# Altium PCB nrf52832_ciaa_dcdc.PcbDoc
Units mil, origin at the board's own origin, x right, y up, seen from the top; angles counter-clockwise.
Board outline 450.25 x 376.41 mil, 4 copper layers (Top Layer, Mid-Layer 1, Mid-Layer 2, Bottom Layer), stack 62.97 mil thick; 17 components, 46 nets, 84 pads, 42 vias.
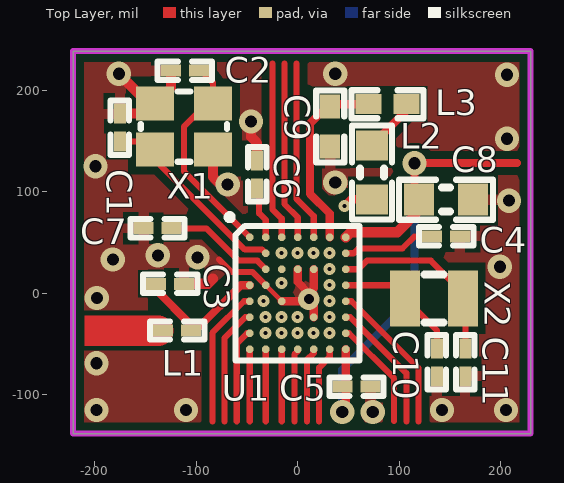
[diagram p0: Top Layer view]
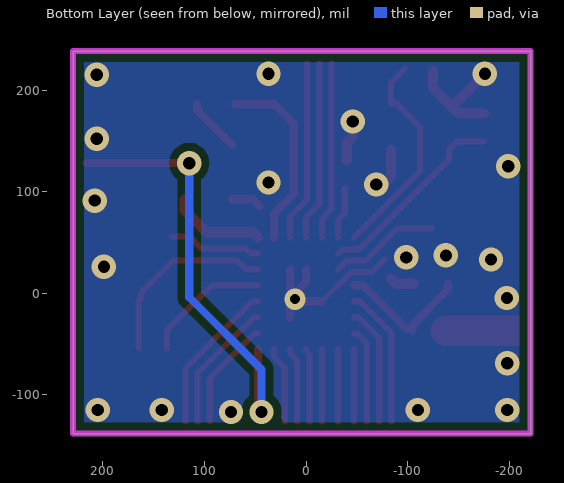
[diagram p1: Bottom Layer view, seen from below]
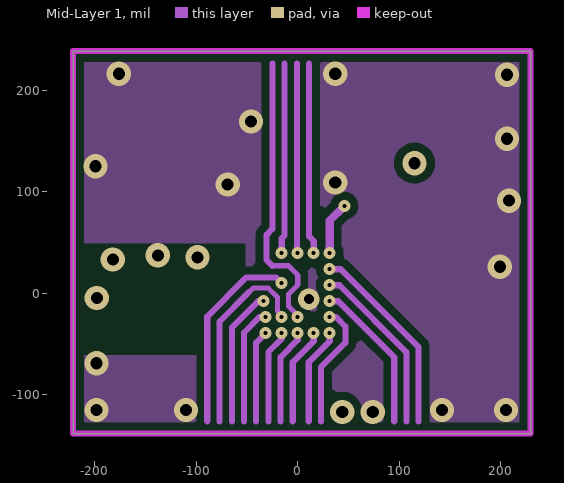
[diagram p2: Mid-Layer 1]
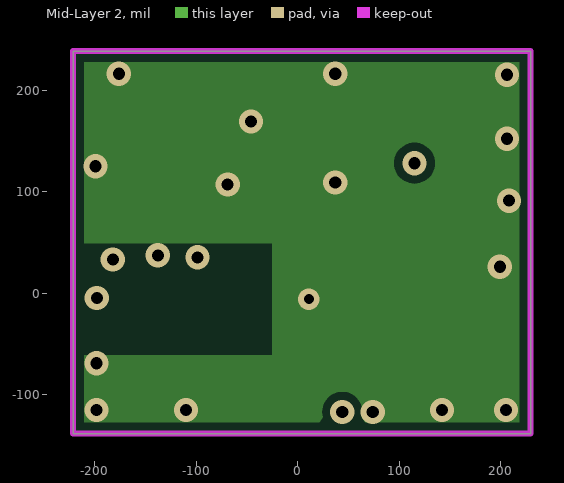
[diagram p3: Mid-Layer 2]
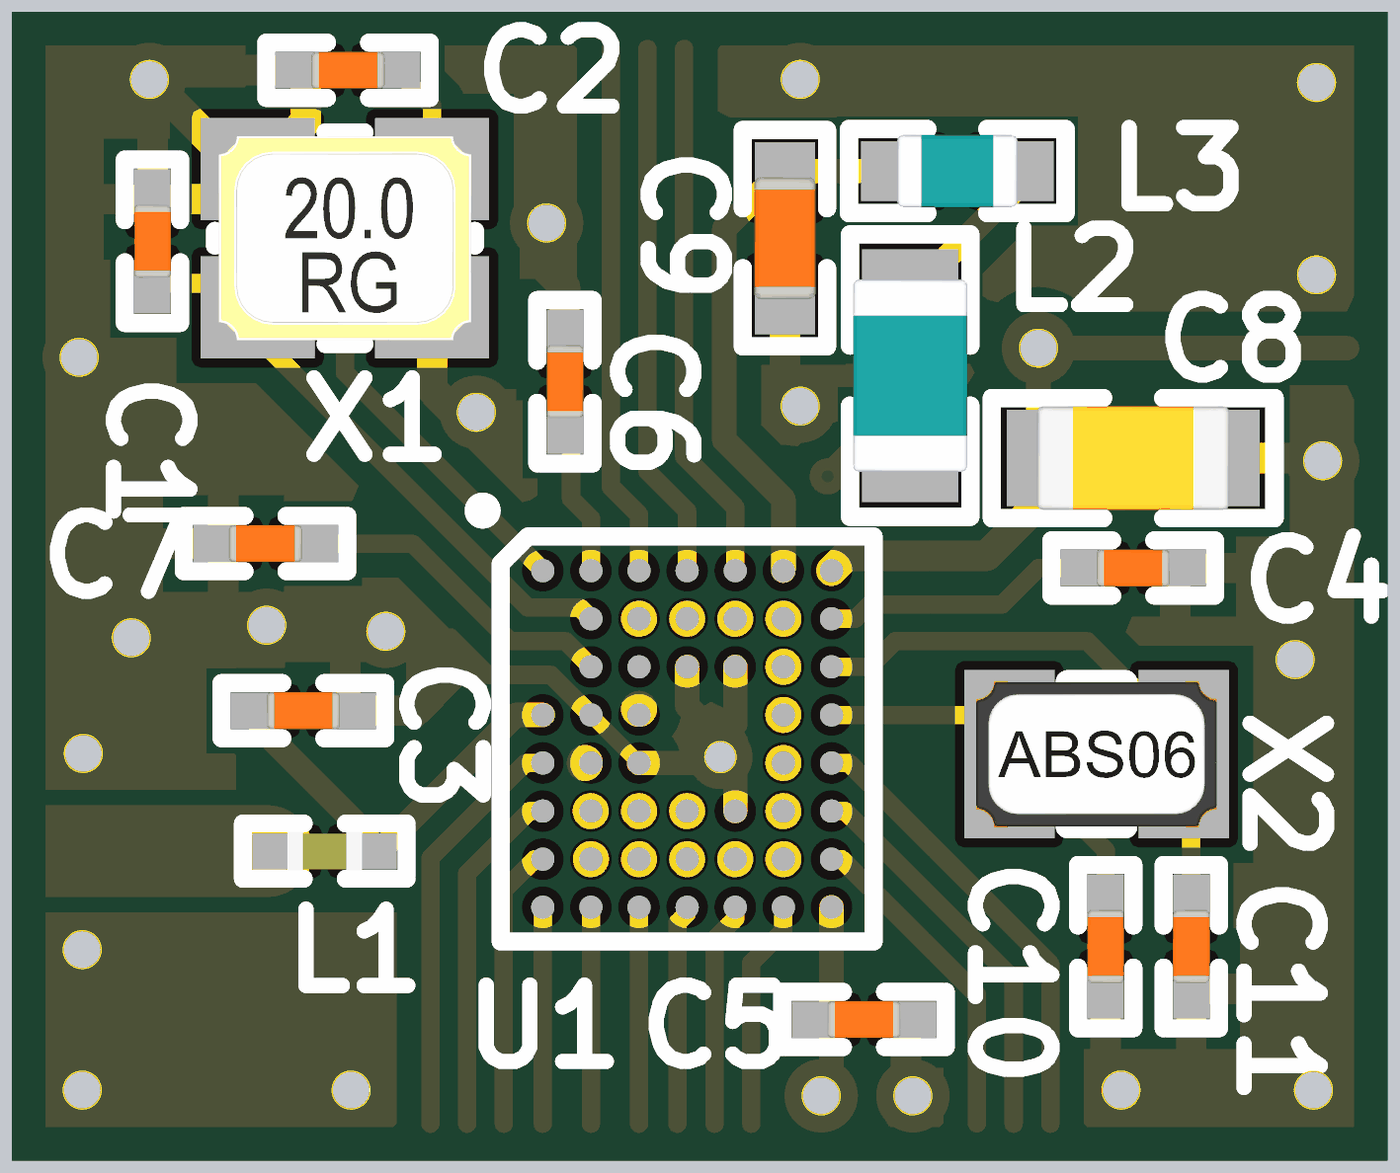
[diagram p4: 3D render of the assembled board from above, using the file's embedded part models]

## Layer stack, top to bottom
Top Solder: solder mask 0.4, Solder Resist, Dk 3.5
Top Layer: signal copper 1.4
Dielectric1: core 9, FR-4, Dk 4.8
Mid-Layer 1: signal copper 1.4
Dielectric2: prepreg 39.3701, FR-4, Dk 4.8
Mid-Layer 2: signal copper 1.4
Dielectric3: core 9, FR-4, Dk 4.8
Bottom Layer: signal copper 1.4
Bottom Solder: solder mask 0.4, Solder Resist, Dk 3.5

## Board outline
-221,-138.19 229.25,-138.19 229.25,238.22 -221,238.22

## Design rules (kind name [scope] priority, off if disabled: settings)
Clearance Polygon_ANT [(InNamedPolygon('Top_Layer-GND')) or (InNamedPolygon('Bottom_Layer-GND')) vs InNet('RF')] p1: gap=5 ignorepadtopadclearanceinfootprint=FALSE except(0: Arc-Hole Track-Hole SMDPad-Hole THPad-Hole Via-Hole Fill-Hole Poly-Hole Region-Hole Text-Hole)
Clearance Polygon [(InNamedPolygon('Top_Layer-GND')) or (InNamedPolygon('Bottom_Layer-GND')) or (InNamedPolygon('Mid_Layer_1-GND')) or (InNamedPolygon('Mid_Layer_2-GND'))] p2: gap=8 ignorepadtopadclearanceinfootprint=FALSE except(0: Arc-Hole Track-Hole SMDPad-Hole THPad-Hole Via-Hole Fill-Hole Poly-Hole Region-Hole Text-Hole)
Clearance [All] p3: gap=3.94 ignorepadtopadclearanceinfootprint=FALSE except(0: Arc-Hole Track-Hole SMDPad-Hole THPad-Hole Via-Hole Fill-Hole Poly-Hole Region-Hole Text-Hole)
ComponentClearance [All] p1 off: gap=10 collisioncheckmode=3 verticalgap=10 showdistances=FALSE
FabricationTestPointUsage TestPointUsage [All] p1: valid=0 allowmultiple=FALSE
FabricationTestpoint Testpoint [All] p1: side=3 testpointundercomponent=TRUE minsize=40 maxsize=100 preferedsize=60 minholesize=0 maxholesize=40 preferedholesize=32 testpointgrid=1 allowsidetop=TRUE allowsidebottom=TRUE usegrid=TRUE gridtolerance=0.01
Height [All] p1 off: minheight=0 maxheight=1000 prefheight=500
HoleSize [All] p1: absolutevalues=TRUE maxlimit=160 minlimit=3 maxpercent=80.000 minpercent=20.000
HoleToHoleClearance [All] p1 off: gap=3 allowstackedmicrovias=FALSE
MinimumAnnularRing [All] p1 off: minimumring=3.94
PolygonConnect PolygonConnect_1 [isVia and innet(gnd)] p1: connectstyle=Direct reliefconductorwidth=10 reliefentries=4 polygonreliefangle="90 Angle" airgapwidth=10
PolygonConnect [All] p2: connectstyle=Relief reliefconductorwidth=10 reliefentries=4 polygonreliefangle="90 Angle" airgapwidth=10
RoutingVias [All] p1: holewidth=16 width=32 viastyle="Through Hole" minholewidth=3.94 minwidth=9.84 maxholewidth=28 maxwidth=50
SilkToSolderMaskClearance SilkscreenOverComponentPads [IsPad] p1: minsilkscreentomaskgap=10 clearancetoexposedcopper=TRUE
SolderMaskExpansion [All] p1: expansion=3 istentingtop=FALSE
Width [All] p1: maxlimit=100 minlimit=3 preferedwidth=6 minimp=50.000000 maximp=50.000000 favimp=50.000000
23 further rules are at their usual default settings.

## Components (designator, comment, footprint, x,y, rotation, side; value= is the part's Value field where it differs from the comment)
C1 "12pF" CAPC0603X03L -175,163 r270 top
C2 "12pF" CAPC0603X03L -111,219 r0 top
C3 "1.0pF" CAPC0603X03L -125.62,9.26 r180 top
C4 "100nF" CAPC0603X03L 146,56 r0 top
C5 "100nF" CAPC0603X03L 57.87,-91.87 r0 top
C6 "100pF" CAPC0603X03L -40,117 r270 top
C7 "100pF" CAPC0603X03L -138,64 r180 top
C8 "4.7µF" CAPC1608X06L 146,92 r0 top (schematic designator C10)
C9 "1.0µF" CAPC1005X04L 32,164 r90 top (schematic designator C8)
C10 "12pF" CAPC0603X03L 137,-68 r90 top (schematic designator C11)
C11 "12pF" CAPC0603X03L 165,-68 r90 top (schematic designator C12)
L1 "3.3nH" INDC0603X03L -118.62,-36.74 r180 top
L2 "10µH" INDC1608X06L 73,119 r270 top
L3 "15nH" INDC1005X04L 88.43,186 r0 top
U1 "nRF52832-CIAA" BGA50C40P7X8_295X322X50 0,0 r0 top locked
X1 "32MHz" BT-XTAL_2016 -112,164 r0 top
X2 "32.768kHz" XTAL_2012 134,-5 r0 top

## Footprints (in the part's own frame and the unit in brackets; to place one, negate y for a bottom-side part, rotate by r counter-clockwise, add the part's x,y. Pads: shape width x height; smd on the part's side, far side on the other; paste and mask are expansions set on the pad)
BGA50C40P7X8_295X322X50 [mm] "BGA, 50-Leads, Body 2.95x3.22mmx0.50mm, Pitch 0.40mm"
  round 0.193 smd: A1(-1.2,1.4) A2(-0.8,1.4) A3(-0.4,1.4) A4(0,1.4) A5(0.4,1.4) A6(0.8,1.4) A7(1.2,1.4) B2(-0.8,1) B3(-0.4,1) B4(0,1) B5(0.4,1) B6(0.8,1) B7(1.2,1) C2(-0.8,0.6) C3(-0.4,0.6) C4(0,0.6) C5(0.4,0.6) C6(0.8,0.6) C7(1.2,0.6) D1(-1.2,0.2) D2(-0.8,0.2) D3(-0.4,0.2) D6(0.8,0.2) D7(1.2,0.2) E1(-1.2,-0.2) E2(-0.8,-0.2) E3(-0.4,-0.2) E6(0.8,-0.2) E7(1.2,-0.2) F1(-1.2,-0.6) F2(-0.8,-0.6) F3(-0.4,-0.6) F4(0,-0.6) F5(0.4,-0.6) F6(0.8,-0.6) F7(1.2,-0.6) G1(-1.2,-1) G2(-0.8,-1) G3(-0.4,-1) G4(0,-1) G5(0.4,-1) G6(0.8,-1) G7(1.2,-1) H1(-1.2,-1.4) H2(-0.8,-1.4) H3(-0.4,-1.4) H4(0,-1.4) H5(0.4,-1.4) H6(0.8,-1.4) H7(1.2,-1.4)
  silkscreen extent -1.75,-1.69 1.55,1.95, body extent -1.48,-1.61 1.48,1.61, height 0.51
BT-XTAL_2016 [mm] "Crystal 2.0 x 1.6 mm"
  rect 0.95x0.85 smd: 1(-0.725,-0.575) 2(0.725,-0.575) 3(0.725,0.575) 4(-0.725,0.575)
  silkscreen extent -1.08,-0.88 1.08,0.88, body extent -1.05,-0.85 1.05,0.85, height 0.56
CAPC0603X03L [mm] "Chip Capacitor, 2-Leads, Body 0.6x0.3mm, IPC High Density"
  rect 0.5x0.3 smd: 1(-0.35,0) 2(0.35,0)
  silkscreen extent -0.68,-0.23 0.68,0.23, body extent -0.3,-0.15 0.31,0.15, height 0.3
CAPC1005X04L [mm] "Chip Capacitor, 2-Leads, Body 1.0x0.5mm, IPC High Density"
  rect 0.6x0.5 smd: 1(-0.5,0) 2(0.5,0)
  silkscreen extent -0.9,-0.35 0.9,0.35, body extent -0.51,-0.25 0.51,0.25, height 0.5
CAPC1608X06L [mm] "Chip Capacitor, 2-Leads, Body 1.6x0.8mm, IPC High Density"
  rect 0.75x0.8 smd: 1(-0.675,0) 2(0.675,0)
  silkscreen extent -1.17,-0.5 1.17,0.5, body extent -0.8,-0.43 0.8,0.43, height 0.8
INDC0603X03L [mm] "Chip Inductor, 2-Leads, Body 0.6x0.3mm, IPC High Density"
  rect 0.5x0.3 smd: 1(-0.35,0) 2(0.35,0)
  silkscreen extent -0.68,-0.23 0.68,0.23, body extent -0.31,-0.16 0.31,0.16, height 0.26
INDC1005X04L [mm] "Chip Inductor, 2-Leads, Body 1.0x0.5mm, IPC High Density"
  rect 0.65x0.5 smd: 1(-0.475,0) 2(0.475,0)
  silkscreen extent -0.9,-0.35 0.9,0.35, body extent -0.5,-0.3 0.5,0.3, height 0.5
INDC1608X06L [mm] "Chip Inductor, 2-Leads, Body 1.6x0.8mm, IPC High Density"
  rect 0.75x0.8 smd: 1(-0.675,0) 2(0.675,0)
  silkscreen extent -1.17,-0.5 1.17,0.5, body extent -0.8,-0.48 0.8,0.48, height 0.8
XTAL_2012 [mm] "XTAL SMD 2.0 x 1.2 mm"
  rect 0.75x1.4 smd: 1(-0.725,0) 2(0.725,0)
  silkscreen extent -0.24,-0.6 0.24,0.6, body extent -1,-0.61 1,0.61, height 0.6

## Part data
C1 C2 C10 C11: library part C0201-12p, "Capacitor, NP0, ±2%"
C3: library part C0201-1.0p, "Capacitor, NP0, ±5%"
C4 C5: library part C0201-100n, "Capacitor, X7R, ±10%"
C6 C7: library part C0201-100p, "Capacitor, NP0, ±5%"
C8: library part C0603-4µ7, "Capacitor, X5R, ±10%"
C9: library part C0402-1µ0, "Capacitor, X5R, ±5%"
L1: library part L0201-3n3, "High frequency chip inductor ±5%"
L2: library part L0603-10µ, "Chip inductor, IDC,min = 50 mA, ±20%"
L3: library part L0402-15n, "High frequency chip inductor ±10%"
U1: "Multi-protocol Bluetooth Low Energy, ANT and 2.4GHz proprietary system-on-chip"
X1: library part XTAL_SMD2016_32MHz_8pF_Epson, "XTAL SMD 2016, 32MHz, Cl=8pF, Total Tol: ±40ppm"
X2: library part XTAL_SMD2012_32.768kHz_9pF_Seiko, "XTAL SMD 2012, 32.768kHz, Cl=9pF, Total Tol: ±50ppm"

## Via types
v1: diameter 24, hole 12, Top Layer to Bottom Layer, tented both sides, 22 vias
v2: diameter 11.81, hole 3.94, Top Layer to Mid-Layer 1, tented both sides, 18 vias
v3: diameter 21, hole 9.84, Top Layer to Bottom Layer, tented both sides, 1 vias
v4: diameter 11.81, hole 3.94, Top Layer to Mid-Layer 1, tented top, 1 vias

## Nets (pads, with @x,y where several pads share a name; then routed paths per layer and width w, separated by ;. In a path a pad name is that pad's centre, name@x,y a point inside that pad or via, vN(x,y) a via of type N, cw(c..) or ccw(c..) an arc to the next point about the centre after c; other vN are vias at no path point)
DEC1: C4.1 U1.B7 | length 91.9
  Top Layer w6: U1.B7 55,39.37 59.63,44 103,44 115,56 C4.1
DEC2: C6.2 U1.A2 | length 50.8
  Top Layer w6: C6.2@-38,103.22 -38,78.7 -31.5,72.2 U1.A2
DEC3: C7.1 U1.C2 | length 120.4
  Top Layer w6: C7.1@-124.09,63.87 -111.87,63.87 ; C7.1@-123,63.87 -89.87,63.87 -58,32 -39.87,32 U1.C2
DEC4: C9.2 L3.1 U1.A6 | length 185.4
  Top Layer w8: U1.A6 31.5,78.5 12.16,97.84 12.16,167.16 31,186 L3.1
GND: C1.1 C2.1 C3.1 C4.2 C5.2 C6.1 C7.2 C8.2 C9.1 C10.1 C11.1 U1.C4 U1.C5 U1.D2 U1.E3 U1.F5 X1.2 X1.4 | length 422.7
  Top Layer w5: U1.D2 U1.E3
  Top Layer w6: -77.62,33.26 -65.36,21 -44.62,21 U1.D2
  Top Layer w8: U1.E3 3,-7.87 v3@10.87,0 ; U1.C4 0,10.87 v3@10.87,0 ; U1.F5 15.75,-4.87 v3@10.87,0 ; U1.C5 15.75,4.87 v3@10.87,0
  Top Layer w10: v1(-176,216) -146.64,186.64 X1.4 ; C1.1 -150.4,176.78 X1.4 ; C2.1 -124.78,202.4 X1.4 ; C3.1@-105.84,9.26 -88.62,9.26 -83.62,14.26 ; X1.2 -83.46,114.46 -76,107 v1(-69,107) ; v1(-46,169) -46,157 -46,154 -40,148 C6.1
  other v1: 73.87,-116.87 -198,-115 -110,-115 142,-115 205,-115 -198,-69 -197.62,-4.74 199,26 -181.94,33.13 -98.62,35.26 -137.62,37.26 208,91.13 37,109 -199,125 206,152 206,215 37,216
  other v3: 10.89,-5.94
NetC3_2: C3.2 L1.1 U1.D1 | length 129.7
  Top Layer w8: C3.2 -139.4,3.4 -104.85,-31.15 L1.1 ; L1.1@-98.85,-34.96 -56.01,7.87 U1.D1
NetL2_1: L2.1 L3.2 | length 54.6
  Top Layer w8: L2.1@73,145.7 107.13,179.83 L3.2@107.13,186.13
NetL2_2: L2.2 U1.B6 | length 82.3
  Top Layer w8: v4(46,86) 52.43,92.43 L2.2
  Mid-Layer 1 w8: v2(31.5,39.37) 31.5,71.5 v4(46,86)
P0.00/XL1: C10.2 U1.D7 X2.1 | length 125.8
  Top Layer w6: U1.D7 92.58,7.87 X2.1 137,-36.54 C10.2
P0.01/XL2: C11.2 U1.C7 X2.2 | length 187.5
  Top Layer w6: U1.C7 59.62,23.62 68,32 131,32 162.54,0.46 X2.2 165,-7.46 C11.2
P0.02/AIN0: U1.C6 | length 192.4
  Mid-Layer 1 w6: v2(31.5,23.62) 42.38,23.62 119,-53 119,-126.19
P0.03/AIN1: U1.D6 | length 170.8
  Mid-Layer 1 w6: v2(31.5,7.87) 41.13,7.87 107,-58 107,-126
P0.04/AIN2: U1.E6 | length 149.3
  Mid-Layer 1 w6: v2(31.5,-7.87) 39.87,-7.87 95,-63 95,-126
P0.05/AIN3: U1.E7 | length 151.1
  Top Layer w6: U1.E7 52.93,-7.87 118.87,-73.82 118.87,-126
P0.06: U1.F7 | length 129.7
  Top Layer w6: U1.F7 51.71,-23.62 106.87,-78.79 106.87,-126
P0.07: U1.F6 | length 122.3
  Mid-Layer 1 w6: 22.87,-126 22.87,-72.84 46.92,-48.8 ; v2(31.5,-23.62) 37.75,-23.62 46.87,-32.75 46.87,-48.75
P0.08: U1.G7 | length 108.1
  Top Layer w6: U1.G7 50.48,-39.37 94.87,-83.76 94.87,-125.87
P0.09: U1.G6 | length 95.2
  Mid-Layer 1 w6: 10.87,-126 10.87,-67.87 31.5,-47.25 v2(31.5,-39.37)
P0.10: U1.G5 | length 95.2
  Mid-Layer 1 w6: -4.87,-126 -4.87,-67.87 15.75,-47.25 v2(15.75,-39.37)
P0.11: U1.F4 | length 281.5
  Mid-Layer 1 w5: -25.03,27.03 -9.03,27.03 0,18 0,8 -9,-1 -9,-12.92 0,-21.92 v2(0,-23.62)
  Mid-Layer 1 w6: -25.03,27.03 -30.65,32.65 -30.65,57.59 -25,63.25 -25,226
P0.12: U1.H6 | length 75.2
  Top Layer w6: 21,-126 21,-73.22 31.5,-62.72 U1.H6
P0.13: U1.G4 | length 93.6
  Mid-Layer 1 w6: -16.87,-126 -16.87,-62.84 0,-45.97 v2(0,-39.37)
P0.14: U1.H5 | length 73.7
  Top Layer w6: 9,-126 9,-65.67 15.75,-58.92 U1.H5
P0.15: U1.H4 | length 72.2
  Top Layer w6: -3.2,-126 -3.2,-60.2 0,-57 U1.H4
P0.16: U1.H3 | length 70.9
  Top Layer w6: -15.75,-126 U1.H3
P0.17: U1.G3 | length 92.1
  Mid-Layer 1 w6: -28.87,-126 -28.87,-57.87 -15.75,-44.75 v2(-15.75,-39.37)
P0.18: U1.H2 | length 70.9
  Top Layer w6: -31.5,-126 U1.H2
P0.19: U1.F3 | length 189.5
  Mid-Layer 1 w5: -47,2 -44,5 -28.92,5 -20,-3.92 -20,-17.76 v2@-16.68,-21.08
  Mid-Layer 1 w6: -77,-126 -77,-28 -48,1
  other v2: -15.75,-23.62
P0.20: U1.G2 | length 90.5
  Mid-Layer 1 w6: -40.87,-126 -40.87,-48.75 v2(-31.5,-39.37)
P0.21: U1.H1 | length 70.9
  Top Layer w6: -47.24,-126 U1.H1
P0.22: U1.F2 | length 114.9
  Mid-Layer 1 w6: -52.87,-126 -52.87,-38.75 -37.75,-23.62 v2@-31.5,-23.62
  other v2: -31.59,-23.62
P0.23: U1.E2 | length 136.3
  Mid-Layer 1 w6: -64.87,-126 -64.87,-33.78 -38.97,-7.87 v2@-31.5,-7.87
  other v2: -33.5,-7.87
P0.24: U1.E1 | length 136.6
  Top Layer w6: -84,-126 -84,-39 -52.87,-7.87 U1.E1
P0.25: U1.B3 | length 187.8
  Mid-Layer 1 w6: v2(-15.75,39.37) -15.75,54 -13,56.75 -13,226
P0.26: U1.D3 | length 194.5
  Mid-Layer 1 w6: -89,-126 -89,-23 -50.5,15.5 -21.41,15.5 v2(-15.75,9.84)
P0.27: U1.B4 | length 187
  Mid-Layer 1 w6: -0.84,226 -0.84,40.21 v2(0,39.37)
P0.28/AIN4: U1.A3 | length 174.7
  Top Layer w6: -25,226 -25,82.67 -15.75,73.42 U1.A3
P0.29/AIN5: U1.A4 | length 176.3
  Top Layer w6: -13,226 -13,87.64 0,74.64 U1.A4
P0.30/AIN6: U1.A5 | length 177.8
  Top Layer w6: -1,226 -1,92.62 15.75,75.87 U1.A5
P0.31/AIN7: U1.B5 | length 188.5
  Mid-Layer 1 w6: 11.16,226 11.16,55.84 15.75,51.25 v2(15.75,39.37)
RF: L1.2 | length 49.8
  Top Layer w30: -187.16,-36.74 L1.2@-137.41,-36.74
SWDCLK: U1.F1 | length 115.2
  Top Layer w6: -72,-126 -72,-44 -51.62,-23.62 U1.F1
SWDIO: U1.G1 | length 93.4
  Top Layer w6: -60,-126 -60,-49.58 -49.79,-39.37 U1.G1
VDD_NRF: C5.1 C8.1 U1.A7 U1.H7 | length 570
  Top Layer w8: v1(43.87,-116.87) 47.24,-113.5 U1.H7 ; C8.1 115,96.43 v1(115,128) 216,128
  Top Layer w10: U1.A7 52.13,60 98,60 119.43,81.43 C8.1
  Bottom Layer w8: v1(43.87,-116.87) 43.87,-75.13 115,-4 v1(115,128)
XC1: C1.2 U1.B2 X1.1 | length 194.8
  Top Layer w6: C1.2 -148.4,149.22 X1.1 -140.54,131.54 -52,43 -35.13,43 U1.B2
XC2: C2.2 U1.A1 X1.3 | length 213.7
  Top Layer w6: C2.2@-97.22,221 -83.46,207.24 X1.3 -89.36,186.64 -112,164 -112,120 -47.24,55.24 U1.A1
pads on no net: U1.C3

## Polygon pours and split planes (outlines as drawn)
GND on Top Layer "Top_Layer-GND" (solid, remove dead copper, pour order 5): -235.75,-168 -235.75,252 255.25,252 255.25,-168
GND on Mid-Layer 1 "Mid_Layer_1-GND" (solid, remove dead copper, pour order 6): -235.75,-168 -235.75,252 255.25,252 255.25,-168
GND on Mid-Layer 2 "Mid_Layer_2-GND" (solid, remove dead copper, pour order 7): -235.75,-168 -235.75,252 255.25,252 255.25,-168
GND on Bottom Layer "Bottom_Layer-GND" (solid, remove dead copper, pour order 8): -235.75,-168 -235.75,252 255.25,252 255.25,-168

## Keep-outs
Keep-Out Layer:
  the board outline again, w6

## Other copper
Top Layer:
  rectangle net RF: -210,-51.74 -169.28,-21.74
  pour cut-out: -28.87,23.26 -67.62,23.26 -89.62,1.26 -117.62,1.26 -117.62,23.26 -147.62,23.26 -147.62,-56.74 -28.87,-56.74
Mid-Layer 1:
  pour cut-out: -51,49.13 -210.75,49.13 -210.75,-60.87 -51,-60.87
Mid-Layer 2:
  pour cut-out: -25,49.13 -210.75,49.13 -210.75,-60.87 -25,-60.87

## Silkscreen, mask and mechanical layers (free items; w line width, h text height)
Mechanical 1:
  the board outline again, w6

## Dimensions
229.25,238.22 to 229.25,-138.19 on Mechanical 3
-221,-138.19 to 229.25,-138.19 on Mechanical 3